# Altium PCB PCB_2020-09-24_18-18-38_2020-10-03_10-28-07.pcbdoc
Units mil, origin at the board's own origin, x right, y up, seen from the top; angles counter-clockwise.
Board outline 4610 x 4010 mil, 2 copper layers (Top Layer, Bottom Layer); 35 components, 35 nets, 172 pads, 41 vias.
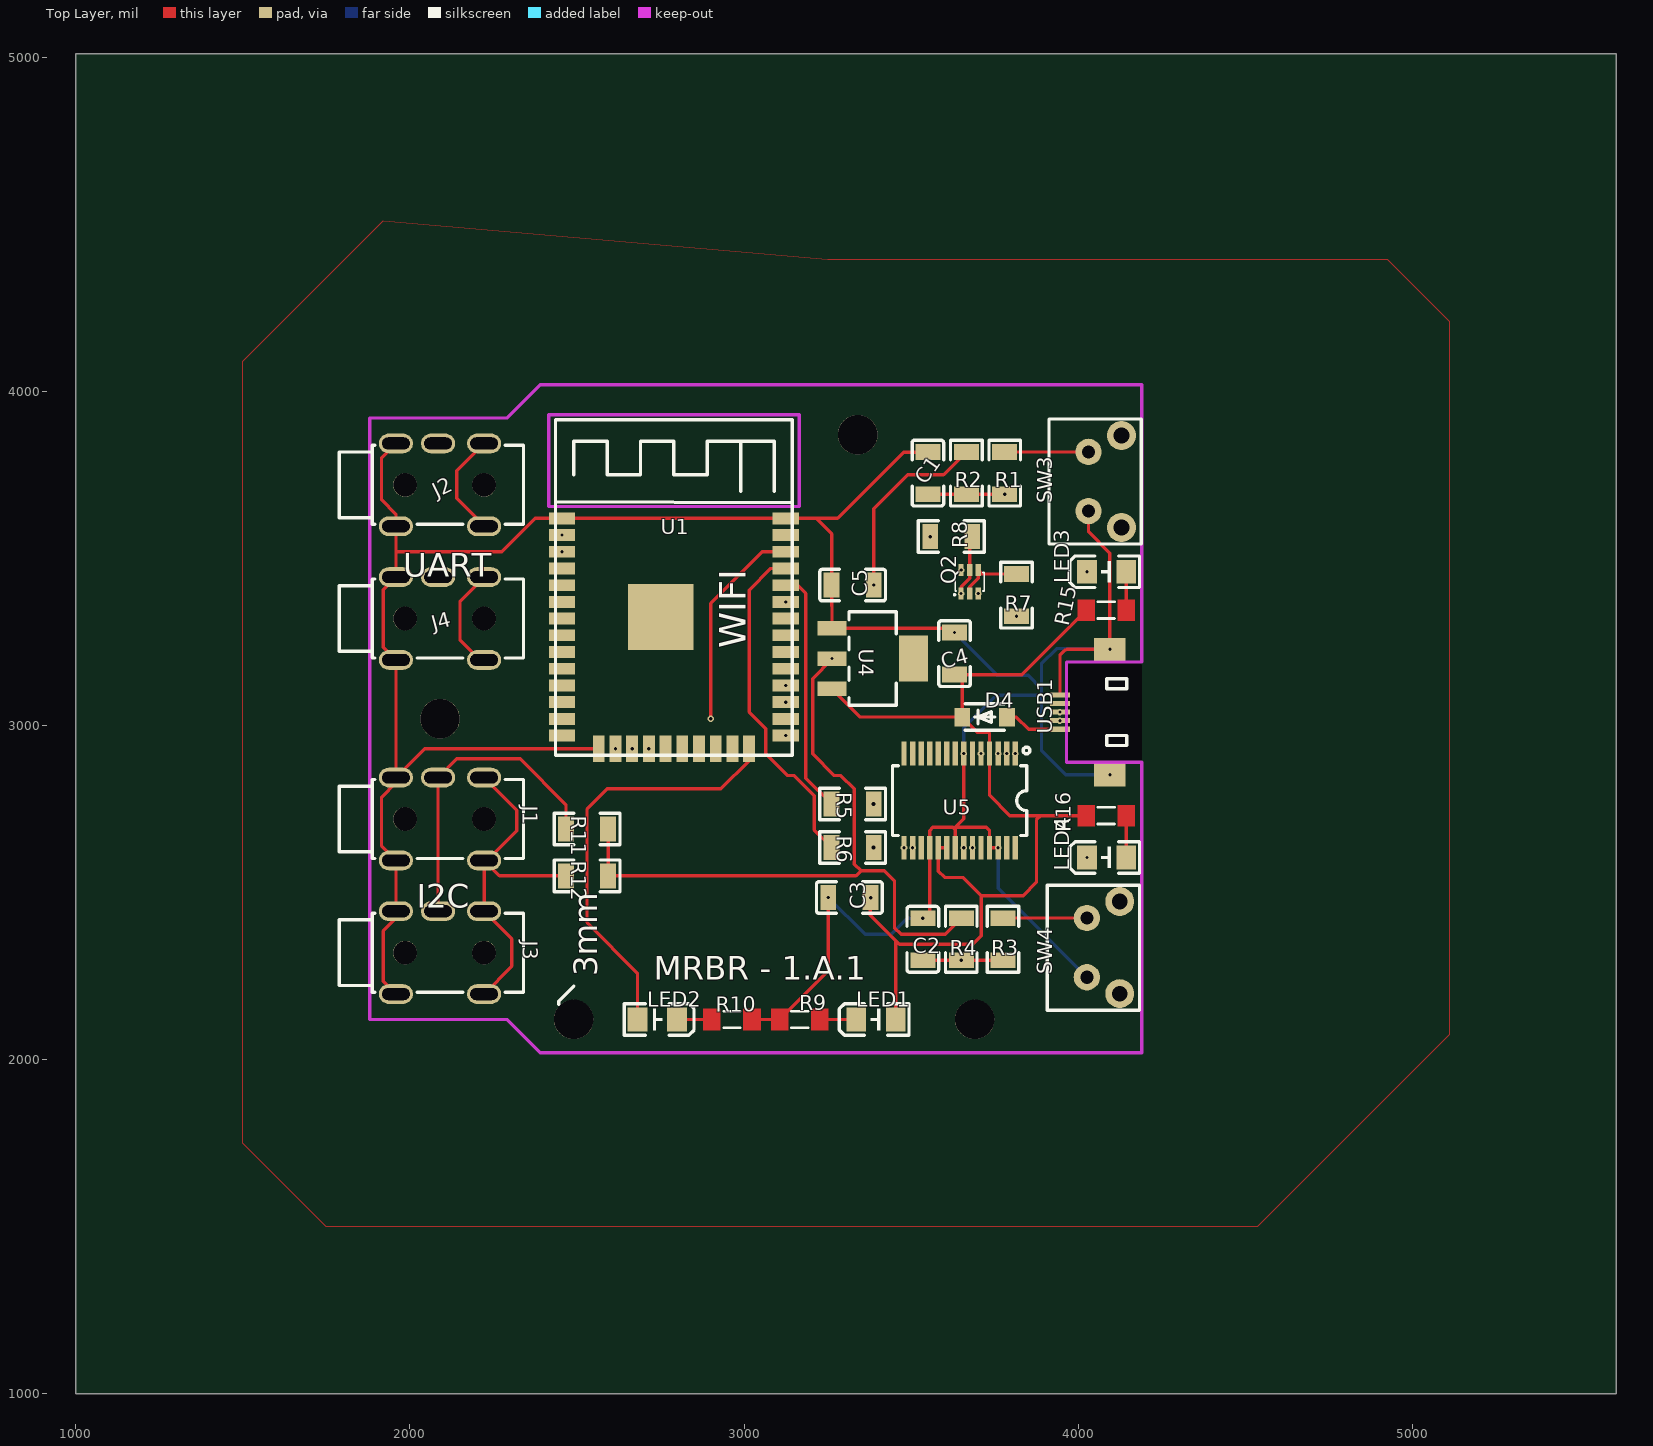
[diagram p0: Top Layer view]
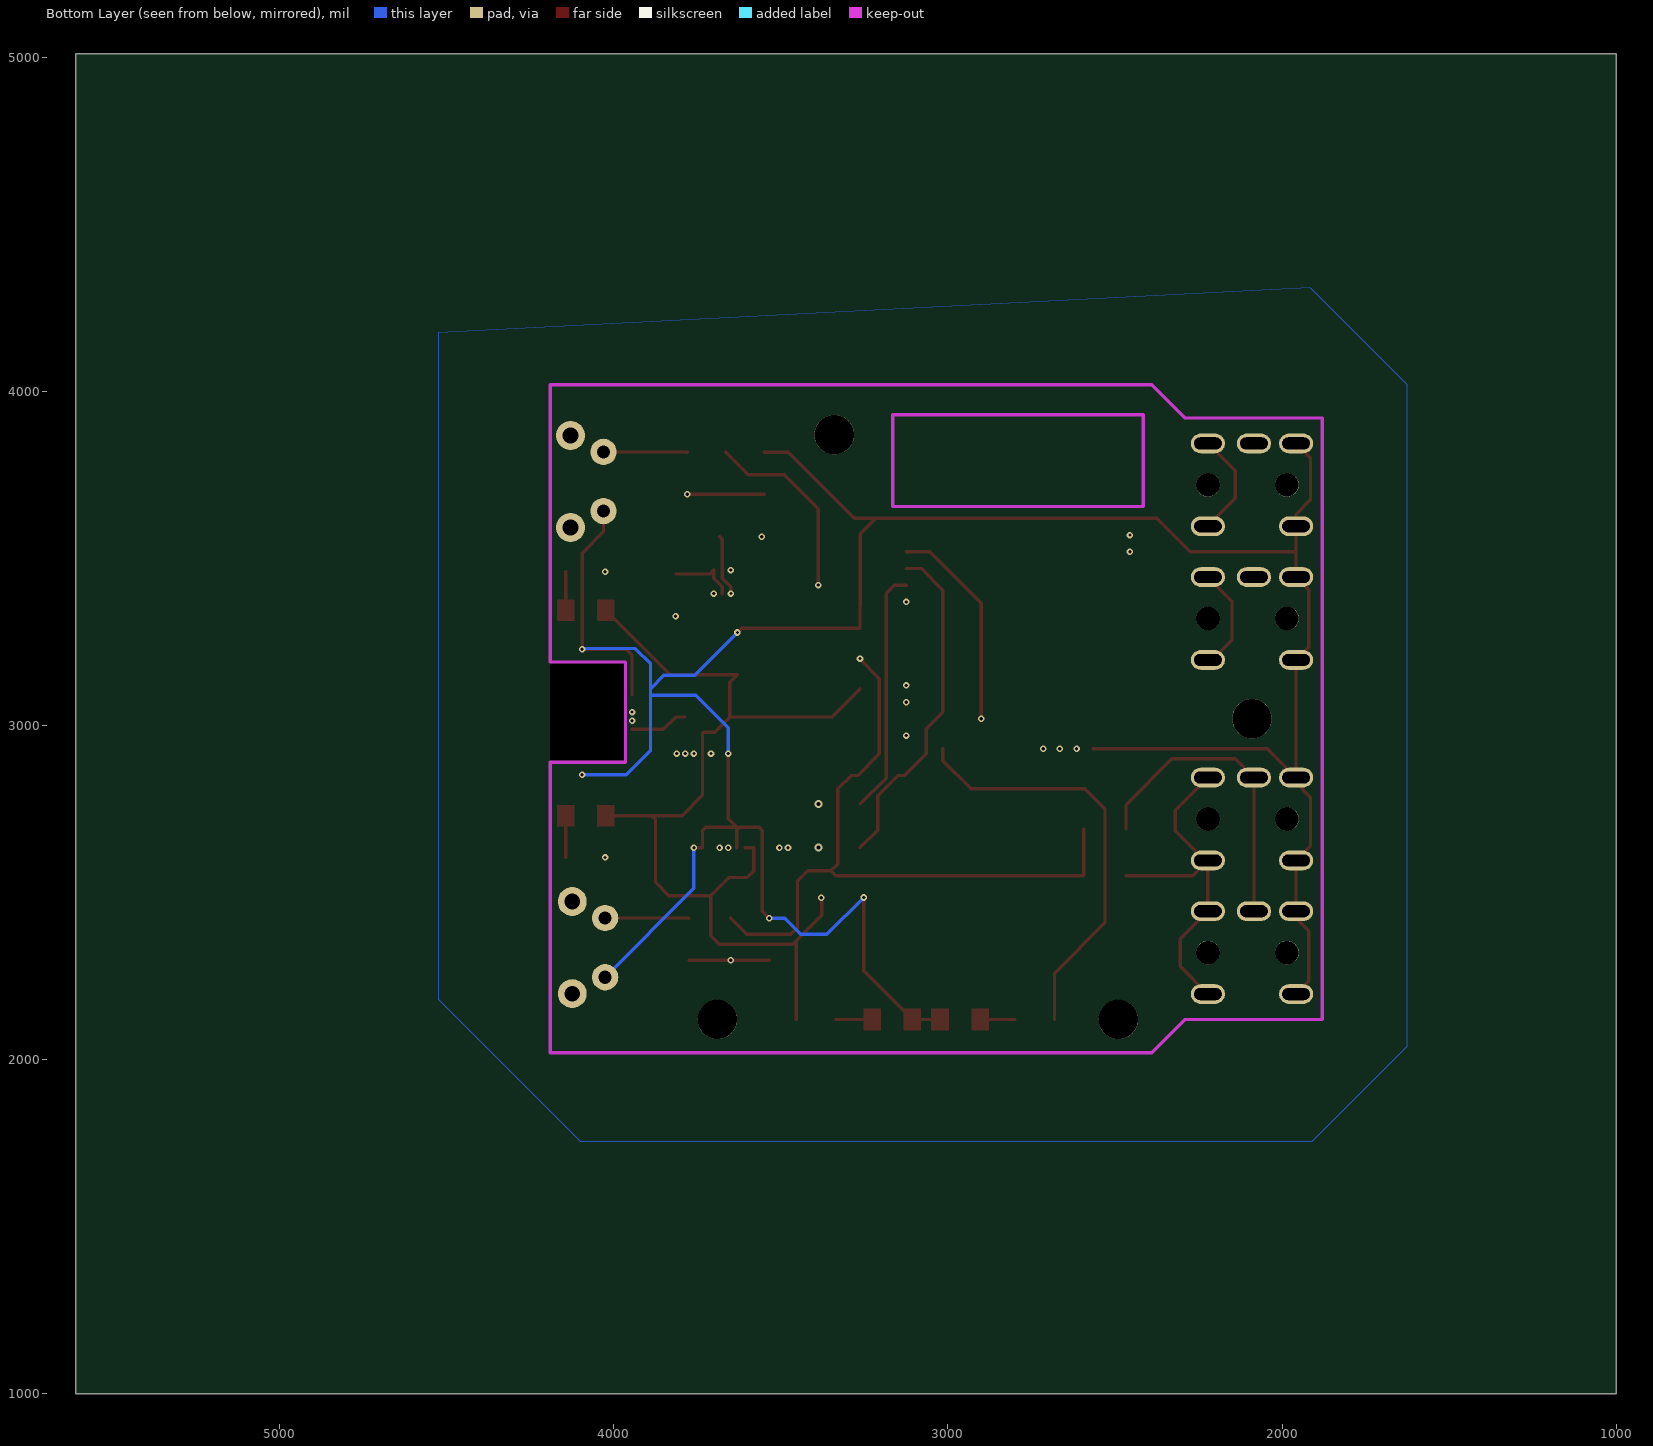
[diagram p1: Bottom Layer view, seen from below]

## Layer stack, top to bottom
Top Layer: signal copper (thickness not stored)
Dielectric: dielectric 12.6, FR-4, Dk 4.8
Bottom Layer: signal copper (thickness not stored)

## Board outline
5610,1000 1000,1000 1000,5010 5610,5010

## Components (designator, comment, footprint, x,y, rotation, side; value= is the part's Value field where it differs from the comment)
C1 "1nF" C1206 3550,3755 r270 top
C2 "1uF" C1206 3535,2360 r270 top
C3 "100nF" C1206 3315,2485 r0 top
C4 "10uF" C1206 3630,3215 r270 top
C5 "10uF" C1206 3325,3420 r0 top
D4 "1N5819W_C369930" SOD-123_L2.8-W1.8-LS3.7-RD 3720,3025 r0 top
J1 "I2C" AUDIO-TH_PJ313D 2090,2720 r0 top
J2 "UART1" AUDIO-TH_PJ313D 2090,3720 r0 top
J3 "I2C" AUDIO-TH_PJ313D 2090,2320 r0 top
J4 "UART2" AUDIO-TH_PJ313D 2090,3320 r0 top
LED1 "PWR_LED_INDICATOR" LED1206-R-RD 3395.01,2120 r0 top
LED2 "BT_LED_INDICATOR" LED1206-R-RD 2740.01,2120 r180 top
LED3 "RXLED" LED1206-R-RD 4085.01,3460 r0 top
LED4 "TXLED" LED1206-R-RD 4085.01,2605 r0 top
Q2 "UMH3NTN" SOT-363_L2.0-W1.3-P0.65-LS2.1-TL 3675,3430 r90 top
R1 "220" R1206 3780,3755 r270 top
R2 "10K" R1206 3665,3755 r90 top
R3 "220" R1206 3775,2360 r270 top
R4 "10K" R1206 3650,2360 r90 top
R5 "470" R1206 3325,2765 r180 top
R6 "470" R1206 3325,2635 r180 top
R7 "10K" R1206 3815,3390 r90 top
R8 "10K" R1206 3620,3565 r0 top
R9 "1K" _1206MP 3185,2120 r0 top
R10 "1K" _1206MP 2945,2120 r180 top
R11 "10K" R1206 2530,2690 r0 top
R12 "10K" R1206 2530,2550 r0 top
R15 "1K" _1206MP 4065,3345 r180 top
R16 "1K" _1206MP 4065,2730 r180 top
SW3 "PTS645VL58-2LFS" KEY-7.0*7.0 4080,3730 r90 top
SW4 "PTS645VL58-2LFS" KEY-7.0*7.0 4075,2335 r90 top
U1 "ESP32-SOLO-1" WIFIM-SMD_38P-L25.5-W18.0-P1.27 2790,3275 r0 top
U4 "NCP1117ST33T3G" SOT-223-3_L6.5-W3.4-P2.30-LS7.0-BR 3385,3200 r180 top
U5 "FT232RL-REEL" SSOP-28_L10.2-W5.3-P0.65-LS7.8-BL 3645,2775 r180 top
USB1 "U253-051N-4BH85-SB" MICRO-USB-SMD_U253-051T-4BH85-SB 4020,3040 r90 top

## Footprints (in the part's own frame and the unit in brackets; to place one, negate y for a bottom-side part, rotate by r counter-clockwise, add the part's x,y. Pads: shape width x height; smd on the part's side, far side on the other; paste and mask are expansions set on the pad)
_1206MP [mm]
  round 0 smd: 1(-2,0) 2(1.048,0)
  Top Layer region: 0.398,0.8 1.698,0.8 1.698,-0.8 0.398,-0.8
  Top Layer region: -2.65,0.8 -1.35,0.8 -1.35,-0.8 -2.65,-0.8
  silkscreen extent -1.11,-0.64 0.16,0.64
AUDIO-TH_PJ313D [mm]
  oval 2.599x1.5 hole 0.9 slot 2.1 at 0 deg: 2(-3.35,-3.15) 2(-3.35,3.15) 3(-0.15,3.15) 4(3.35,-3.15) 4(3.35,3.15)
  round 1.8 hole 1.8 unplated: ""(-2.65,0) ""(3.35,0)
  silkscreen extent -7.65,-3 6.35,3
C1206 [mm]
  rect 1.2x1.9 smd: 1(-1.6,0) 2(1.6,0)
  silkscreen extent -2.5,-1.2 2.5,1.2
KEY-7.0*7.0 [mm]
  round 2 hole 1: 1(-2.25,1.25) 2(2.25,1.25)
  round 2.2 hole 1.199: 3(-3.5,-1.25) 4(3.5,-1.25)
  silkscreen extent -4.75,-2.75 4.75,4.25
LED1206-R-RD [mm]
  rect 1.5x1.8 smd: 1(1.5,0) 2(-1.5,0)
  silkscreen extent -2.8,-1.2 2.5,1.2
MICRO-USB-SMD_U253-051T-4BH85-SB [mm]
  rect 0.4x1.524 smd: 1(-1.3,1.9) 2(-0.65,1.9) 3(0,1.9) 4(0.65,1.9) 5(1.3,1.9)
  rect 1.75x2.4 smd: 6(4.77,-1.9) 7(-4.77,-1.9)
  Multi-Layer board cut-out: -3.683,-4.191 -3.683,1.143 -3.673,1.192 -3.646,1.233 -3.605,1.26 -3.556,1.27 -3.556,1.27 3.556,1.27 3.605,1.26 3.646,1.233 3.673,1.192 3.683,1.143 3.683,1.143 3.683,-4.191 3.673,-4.24 3.646,-4.281 3.605,-4.308 3.556,-4.318 3.556,-4.318 -3.556,-4.318 -3.605,-4.308 -3.646,-4.281 -3.673,-4.24 -3.683,-4.191 -3.683,-4.191
  silkscreen extent -2.54,-3.18 2.54,-1.66
R1206 [mm]
  rect 1.2x1.9 smd: 1(-1.6,0) 2(1.6,0)
  silkscreen extent -2.5,-1.2 2.5,1.2
SOD-123_L2.8-W1.8-LS3.7-RD [mm]
  rect 1.2x1.4 smd: 1(-1.7,0) 2(1.7,0)
  silkscreen extent -1.5,-1 1.5,1
SOT-223-3_L6.5-W3.4-P2.30-LS7.0-BR [mm]
  rect 2.2x1.1 smd: 1(3.099,-2.3) 2(3.099,0) 3(3.099,2.3)
  rect 2.2x3.5 smd: 4(-3.099,0)
  silkscreen extent -1.8,-3.55 1.8,3.55
SOT-363_L2.0-W1.3-P0.65-LS2.1-TL [mm]
  rect 0.9x0.4 smd: 1(-0.9,0.65) 2(-0.9,0) 3(-0.9,-0.65) 4(0.9,-0.65) 5(0.9,0) 6(0.9,0.65)
  silkscreen extent -1.06,-1.1 0.7,1.21
SSOP-28_L10.2-W5.3-P0.65-LS7.8-BL [mil]
  rect 16x71 smd: 1(-166.34,-140.75) 2(-140.75,-140.75) 3(-115.16,-140.75) 4(-89.57,-140.75) 5(-63.98,-140.75) 6(-38.39,-140.75) 7(-12.8,-140.75) 8(12.8,-140.75) 9(38.39,-140.75) 10(63.98,-140.75) 11(89.57,-140.75) 12(115.16,-140.75) 13(140.75,-140.75) 14(166.34,-140.75) 15(166.34,140.75) 16(140.75,140.75) 17(115.16,140.75) 18(89.57,140.75) 19(63.98,140.75) 20(38.39,140.75) 21(12.8,140.75) 22(-12.8,140.75) 23(-38.39,140.75) 24(-63.98,140.75) 25(-89.57,140.75) 26(-115.16,140.75) 27(-140.75,140.75) 28(-166.34,140.75)
  silkscreen extent -210,-160 201,104
WIFIM-SMD_38P-L25.5-W18.0-P1.27 [mm]
  rect 2x0.9 smd: 1(-8.5,8.755) 2(-8.5,7.485) 3(-8.5,6.215) 4(-8.5,4.945) 5(-8.5,3.675) 6(-8.5,2.405) 7(-8.5,1.135) 8(-8.5,-0.135) 9(-8.5,-1.405) 10(-8.5,-2.675) 11(-8.5,-3.945) 12(-8.5,-5.215) 13(-8.5,-6.485) 14(-8.5,-7.755) 25(8.5,-7.755) 26(8.5,-6.485) 27(8.5,-5.215) 28(8.5,-3.945) 29(8.5,-2.675) 30(8.5,-1.405) 31(8.5,-0.135) 32(8.5,1.135) 33(8.5,2.405) 34(8.5,3.675) 35(8.5,4.945) 36(8.5,6.215) 37(8.5,7.485) 38(8.5,8.755)
  rect 0.9x2 smd: 15(-5.715,-8.755) 16(-4.445,-8.755) 17(-3.175,-8.755) 18(-1.905,-8.755) 19(-0.635,-8.755) 20(0.635,-8.755) 21(1.905,-8.755) 22(3.175,-8.755) 23(4.445,-8.755) 24(5.715,-8.755)
  rect 5x5 smd: 39(-1,1.255)
  silkscreen extent -9,-9.26 9,16.24

## Free pads (board coordinates)
  round 118.11 hole 118.11 unplated: ""(2090,3020) ""(2490,2120) ""(3340,3870) ""(3690,2120)

## Via types
v1: diameter 19.69, hole 9.84, Top Layer to Bottom Layer, 39 vias
v2: diameter 24, hole 12, Top Layer to Bottom Layer, 2 vias

## Nets (pads, with @x,y where several pads share a name; then routed paths per layer and width w, separated by ;. In a path a pad name is that pad's centre, name@x,y a point inside that pad or via, vN(x,y) a via of type N, cw(c..) or ccw(c..) an arc to the next point about the centre after c; other vN are vias at no path point)
3V3: C5.2 R2.2 R4.2 R11.2 R12.2 U1.2 U4.2 | length 3983.7
  Top Layer w10: R11.2 R12.2 3335,2550 3350,2565 ; v1(3263,3200) 3263,3198 3205,3140 3205,2915 3270,2850 3290,2850 3330,2810 3330,2585 3350,2565 ; v1(3388,3420) 3388,3648 3490,3750 3597.01,3750 R2.2 ; R4.2 3602.01,2375 3470,2375 3450,2395 3450,2535 3420,2565 3350,2565
  Mid-Layer 1 w10: v1(2455.35,3569.68) 2620.3,3569.7 2690,3500 3075,3500 3240,3335 3240,3249.6 v1(3263,3200) 3388,3325 v1(3388,3420)
+5V: C3.2 C4.2 D4.1 LED1.1 R15.2 R16.2 U4.3 U5.4 U5.19 U5.20 | length 3226.9
  Top Layer w10: U4.3 3347.45,3025 D4.1 ; LED1.1 3454.1,2355.9 3378,2432 ; U5.19@3581.02,2634.25 U5.20@3606.61,2634.25 ; U5.19 3581,2564 3600,2545 3655,2545 3710,2490 ; 3887.85,2730 3875,2717.15 3875,2530 3835,2490 3710,2490 ; R16.2 3795,2730 3734.57,2790.43 3734.57,2915.75 3734.57,2975.43 3730,2980 3698.07,2980 D4.1 ; R15.2 3830.75,3152.01 C4.2 3653.07,3128.94 D4.1 ; 3378,2432 C3.2 3378,2432 ; 3378,2432 3465,2345 3685,2345 3710,2370 3710,2490
  other v1: 3379.06,2483.93
BT_LED: LED2.1 U1.24 | length 1272.9
  Top Layer w10: LED2.1 2680.95,2259.05 2530,2410 2530,2750 2590,2810 2930,2810 3015,2895 U1.24
D+: U5.15 USB1.3 | length 780.6
  Mid-Layer 1 w10: v1@3478.7,2634.3 3478.7,2743.7 3540,2805 3795,2805 3845,2855 3845,2995 3890,3040 v1(3945.2,3040)
  other v1: 3478.66,2634.25
D-: U5.16 USB1.2 | length 744.5
  Mid-Layer 1 w10: v1@3504.2,2634.3 3505,2740 3550,2785 3805,2785 3865,2845 3865,2990 3889.4,3014.4 v1(3945.2,3014.41)
  other v1: 3504.25,2634.25
DTR: Q2.2 Q2.4 R7.2 | length 201
  Top Layer w10: Q2.2 3675,3415 3700.6,3440.6 Q2.4 3713.04,3452.99 R7.2
EN: C2.2 Q2.6 R3.2 R4.1 U1.3 | length 3506.6
  Top Layer w10: C2.2 v1(3650,2297) R3.2
  Mid-Layer 1 w10: v1(3650,2297) 3725,2372 3725,2495 3640,2580 3450,2580 3450,3050 3375,3125 3375,3245 3460,3330 3460,3605 3505,3650 3615,3650 3650,3615 v1(3650,3465)
  Mid-Layer 2 w10: v1(2455.35,3519.68) 2820,3520 2875,3575 3420,3575 3530,3465 v1(3650,3465)
GND: C1.1 C2.1 C3.1 C4.1 C5.1 J1.2 J2.2 J3.2 J4.2 R9.1 R10.1 SW3.1 SW4.1 U1.1 U1.15 U1.38 U4.1 U5.7 U5.18 U5.21 U5.25 U5.26 USB1.5 USB1.6 USB1.7 | length 9262.1
  Top Layer w10: J3.2@1958.11,2195.98 1920,2234.09 1920,2385 1958.11,2423.11 1958.11,2444.02 1958.11,2595.98 1915,2639.09 1915,2785 1958.11,2828.11 J1.2@1958.11,2844.02 ; 1958.1,3519.4 2274.4,3519.4 2375.3,3619.7 U1.1 ; J2.2@1958.11,3844.02 1915,3800.91 1915,3675 1958.11,3631.89 1958.11,3595.98 1958.11,3444.02 1920,3405.91 1920,3234.09 1958.11,3195.98 J1.2@1958.11,2844.02 ; U1.1 U1.38 3215.32,3619.68 3262.01,3572.99 C5.1 U4.1@3263,3290.5 ; U1.15 2044.4,2930.31 J1.2@1958.11,2844.02 ; R10.1 R9.1 3252.01,2265.75 v1(3252.01,2485) ; U1.38 3279.7,3619.7 3478,3818 C1.1 ; U4.1 3617.45,3290.55 v1(3630,3277.99) ; v1(3535,2422.99) 3555.43,2443.43 3555.43,2634.25 3555.43,2685.43 3565,2695 3625,2695 3632.2,2687.8 U5.21@3632.2,2634.25 ; v1(3657.8,2915.75) 3657.8,2720.36 3632.44,2695 3725,2695 3734.57,2685.43 3734.57,2634.25 v1(3760.16,2634.25) ; USB1.5 3945.2,3210.2 3960,3225 3967.21,3227.79 v1(4094.8,3227.79) 4094.8,3515.2 4030.8,3579.2 SW3.1
  Bottom Layer w10: v1(3252.01,2485) 3362.01,2375 3440,2375 3487.99,2422.99 v1(3535,2422.99) ; v1(3630,3277.99) 3757.99,3150 3850,3150 3890,3110 3890,3090.28 ; v1(3657.8,2915.75) 3657.8,2992.8 3755,3090 3890,3090 ; v1(3760.16,2634.25) 3760.16,2512.04 SW4.1 ; v1(4094.8,2852.2) 3962.8,2852.2 3890,2925 3890,3185 3935,3230 4092.59,3230 v1(4094.8,3227.79)
IO0: C1.2 Q2.3 R1.2 R2.1 U1.25 | length 1405.2
  Top Layer w10: C1.2 R2.1 v1(3780,3692.01)
  Mid-Layer 1 w10: v1(3700.59,3394.57) 3740,3433.98 3740,3605 3780,3645 v1(3780,3692.01)
  Mid-Layer 2 w10: v1(3124.65,2969.68) 3434.7,2969.7 3700,3235 v1(3700.59,3394.57)
LED1_2: LED1.2 R9.2 | length 109.7
  Top Layer w10: R9.2 LED1.2@3335.95,2120
LED3_1: LED3.1 R15.1 | length 115
  Top Layer w10: R15.1 LED3.1
LED4_1: LED4.1 R16.1 | length 125
  Top Layer w10: R16.1 LED4.1
R1_1: R1.1 SW3.2 | length 250.8
  Top Layer w10: R1.1 SW3.2
R3_1: R3.1 SW4.2 | length 250.8
  Top Layer w10: R3.1 SW4.2
R10_2: LED2.2 R10.2 | length 104.7
  Top Layer w10: LED2.2 R10.2
RTS: Q2.1 Q2.5 R8.2 U1.16 | length 1451.9
  Top Layer w10: v1(3649.42,3394.58) 3649.42,3414.42 3675.01,3440.01 Q2.5 3675.01,3557.02 R8.2
  Mid-Layer 2 w10: v1(2615,2930.31) 2615,3000 2645,3030 2700,3030 2950,3280 3534.84,3280 v1(3649.42,3394.58)
RX: R6.2 U1.35 | length 1020.4
  Top Layer w10: U1.35 3079.7,3469.7 3015,3405 3015,3040 3065,2990 3065,2915 3130,2850 3150,2850 3210,2790 3210,2687 R6.2
RX1: J2.3 U1.18 | length 1635.2
  Mid-Layer 2 w10: J2.3 2150,3778.1 2150,3110 2510,2750 2680,2750 2715,2785 v1(2715,2930.31)
RX2: J4.4 U1.28 | length 1249.5
  Top Layer w10: J4.4@2221.89,3195.98 2209.02,3195.98 2150,3255 2150,3372.12 J4.4@2221.89,3444.01
  Mid-Layer 1 w10: J4.4@2221.89,3195.98 2298.19,3119.68 v1(3124.65,3119.68)
S$1687: 
S$1689: 
S$1712: 
S$1743: 
SCL: J1.3 J3.3 R11.1 U1.36 | length 2458.3
  Top Layer w10: J3.3 J1.3 2140.07,2900 2330,2900 2467,2763 R11.1 ; v1(2900,3020) 2900,3365 3054.7,3519.7 U1.36
  Mid-Layer 1 w10: J1.3 2155.07,2915 2320,2915 2425,3020 v1(2900,3020)
SDA: J1.4 J3.4 R12.1 U1.33 | length 2562.5
  Top Layer w10: J3.4@2221.9,2196 2305,2280 2305,2360.9 2221.9,2444 J1.4@2221.89,2595.98 ; J1.4@2221.89,2844.01 2320,2745.9 2320,2685 2230.98,2595.98 J1.4@2221.89,2595.98 ; R12.1 2267.87,2550 J1.4@2221.89,2595.98
  Mid-Layer 1 w10: J1.4@2221.9,2844 3115,2845 3195,2925 3195,3325 3150.3,3369.7 v1(3124.65,3369.68)
TX: R5.2 U1.34 | length 732.5
  Top Layer w10: U1.34 3160.3,3419.7 3185,3395 3185,2842 R5.2
TX1: J2.4 U1.17 | length 1491.4
  Top Layer w10: J2.4@2221.89,3595.98 2221.89,3598.11 2140,3680 2140,3762.12 J2.4@2221.89,3844.01
  Mid-Layer 2 w10: J2.4@2221.9,3596 2315,3502.9 2315,3010 2530,2795 2625,2795 2665,2835 v1(2665,2930.31)
TX2: J4.3 U1.27 | length 1326.3
  Mid-Layer 1 w10: J4.3 2084.09,3220.91 2235.32,3069.68 v1(3124.65,3069.68)
U5_1: R5.1 U5.1 | length 526.4
  Mid-Layer 2 w10: v2(3388,2765) 3730,2765 3811.34,2846.34 v1(3811.34,2915.75)
U5_2: R7.1 U5.2 | length 423.4
  Mid-Layer 1 w10: v1(3785.75,2915.75) 3785.75,3297.75 v1(3815,3327)
U5_3: R8.1 U5.3 | length 844.9
  Mid-Layer 1 w10: v1(3557.01,3565) 3525,3532.99 3525,3035 3575,2985 3720,2985 3760.16,2944.84 v1(3760.16,2915.75)
U5_5: R6.1 U5.5 | length 660.9
  Mid-Layer 2 w10: v2(3388,2635) 3330,2693 3330,2825 3345,2840 3685,2840 3708.98,2863.98 v1(3708.98,2915.75)
U5_22: LED4.2 U5.22 | length 426.8
  Mid-Layer 1 w10: v1(3657.8,2634.25) 3657.8,2597.2 3680,2575 3995.95,2575 v1(4025.95,2605)
U5_23: LED3.2 U5.23 | length 1003.3
  Mid-Layer 2 w10: v1(3683.39,2634.25) 3754.14,2705 3815,2705 3905,2795 3905,3160 4025.95,3280.95 v1(4025.95,3460)
USB1_1: D4.2 USB1.1 | length 173.3
  Top Layer w10: D4.2 3815,3025 3851.19,2988.81 USB1.1
pads on no net: J1. J2. J3. J4. SW3.3 SW3.4 SW4.3 SW4.4 U1.4 U1.5 U1.6 U1.7 U1.8 U1.9 U1.10 U1.11 U1.12 U1.13 U1.14 U1.19 U1.20 U1.21 U1.22 U1.23 U1.26 U1.29 U1.30 U1.31 U1.32 U1.37 U1.39 U4.4 U5.6 U5.8 U5.9 U5.10 U5.11 U5.12 U5.13 U5.14 U5.17 U5.24 U5.27 U5.28 USB1.4

## Polygon pours and split planes (outlines as drawn)
GND on Bottom Layer (solid): 4525,4175 4525,2180 4100,1755 1910,1755 1625,2040 1625,4020 1915,4310
GND on Top Layer (solid): 3250,4395 4925,4395 5110,4210 5110,2075 4535,1500 1750,1500 1500,1750 1500,4090 1920,4510

## Silkscreen, mask and mechanical layers (free items; w line width, h text height)
Top Overlay:
  lines w10 net S$1712: 2445,2165 2445,2175 2490,2220
  text "UART" at 1980,3444.57 h70.87
  text "I2C" at 2020,2454.57 h70.87
  text "3mm" at 2560.43,2250 h70.87 r90
  text "MRBR - 1.A.1" at 2730,2239.57 h70.87

## Text inside footprints (layer, text, board x,y; h text height)
U1: Top Overlay "WIFI" at 3005,3230.31 h80 r90